# Altium PCB PCB1.PcbDoc
Units mm, origin at the board's own origin, x right, y up, seen from the top; angles counter-clockwise.
Board outline 102 x 102 mm, 2 copper layers (Top Layer, Bottom Layer); 131 components, 14 nets, 374 pads, 0 vias.
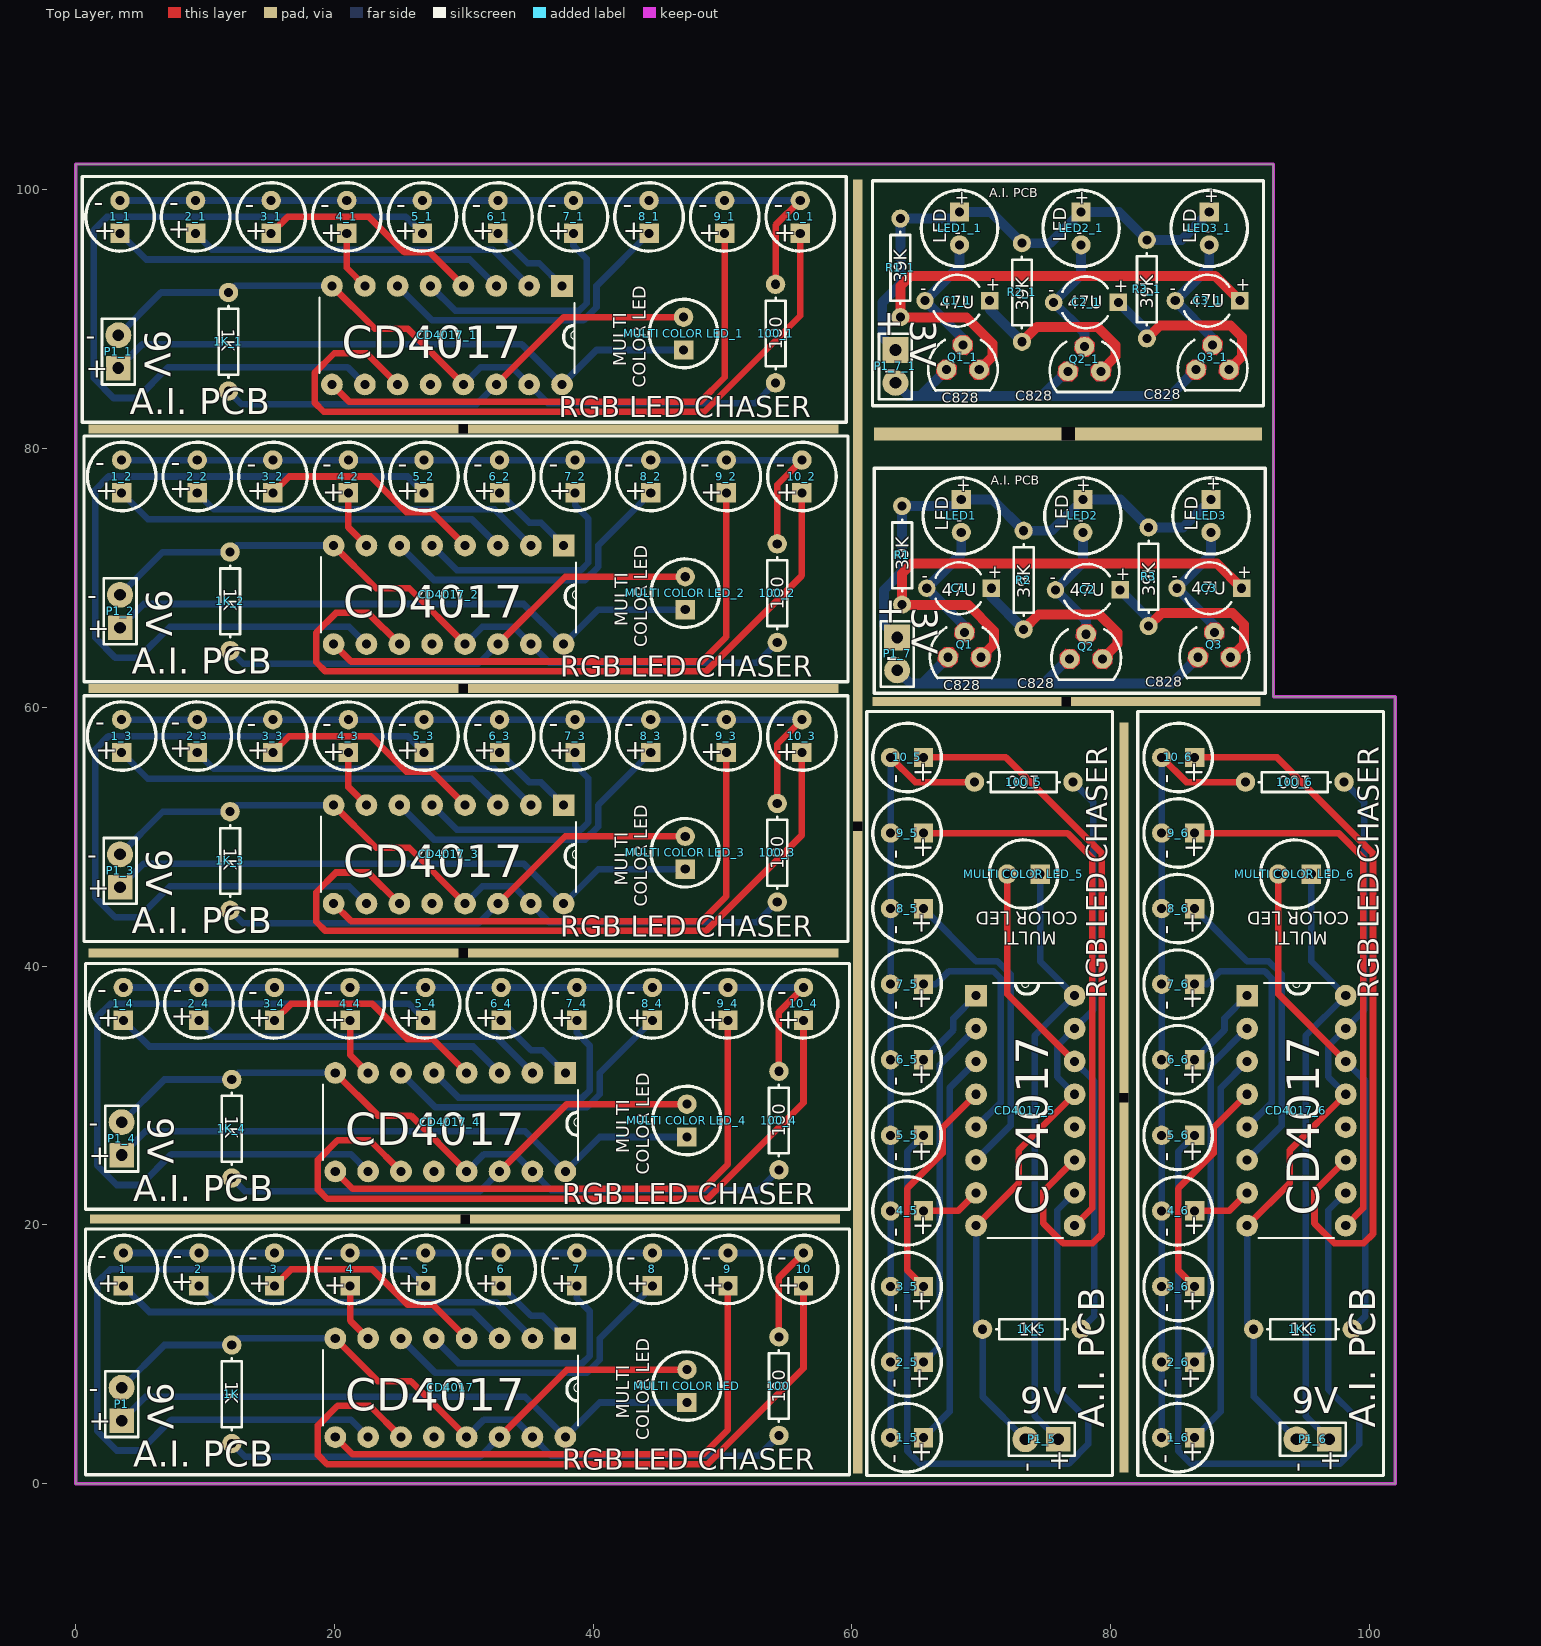
[diagram p0: Top Layer view]
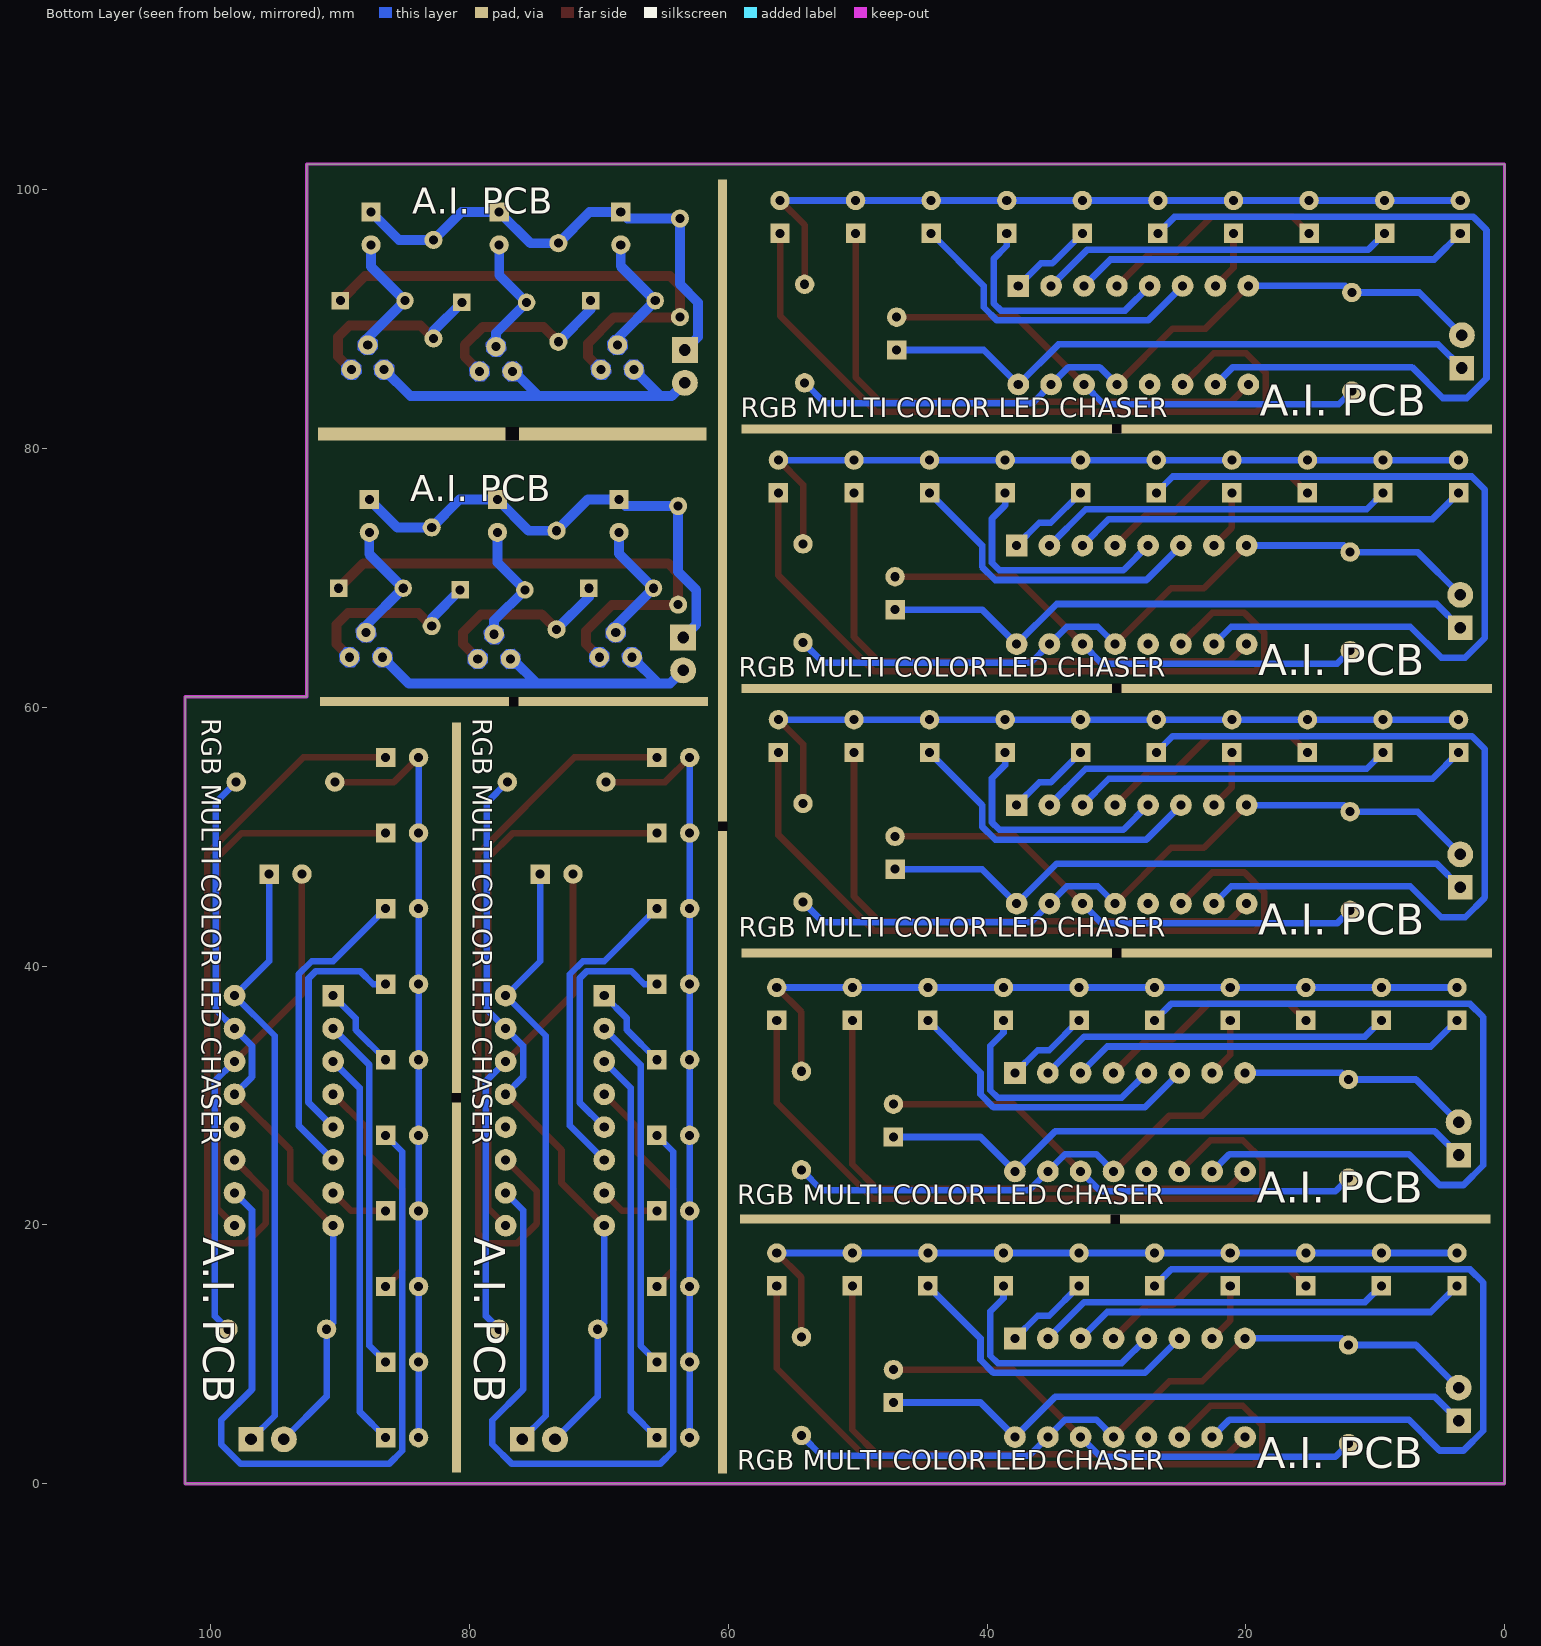
[diagram p1: Bottom Layer view, seen from below]

## Layer stack, top to bottom
Top Solder: solder mask 0.0102, Solder Resist, Dk 3.5
Top Layer: signal copper 0.0356
Dielectric 1: dielectric 0.32, FR-4, Dk 4.8
Bottom Layer: signal copper 0.0356
Bottom Solder: solder mask 0.0102, Solder Resist, Dk 3.5

## Board outline
0,0 102,0 102,60.833 92.583,60.833 92.583,102 0,102

## Design rules (kind name [scope] priority, off if disabled: settings)
Clearance [All] p1: gap=0.254 ignorepadtopadclearanceinfootprint=FALSE except(0: Arc-Hole Track-Hole SMDPad-Hole THPad-Hole Via-Hole Fill-Hole Poly-Hole Region-Hole Text-Hole)
PolygonConnect [All] p1: connectstyle=Relief reliefconductorwidth=0.254 reliefentries=4 polygonreliefangle="90 Angle" airgapwidth=0.254
RoutingVias [All] p1: holewidth=0.711 width=1.27 viastyle="Through Hole" minholewidth=0.711 minwidth=1.27 maxholewidth=0.711 maxwidth=1.27
SolderMaskExpansion [All] p1: expansion=0.102
Width [All] p1: maxlimit=0.762 minlimit=0.254 preferedwidth=0.508
30 further rules are at their usual default settings.

## Classes and differential pairs
component class Sheet1: 1 1K 2 3 4 5 6 7 8 9 10 100 CD4017 "MULTI COLOR LED" P1

## Components (designator, comment, footprint, x,y, rotation, side; value= is the part's Value field where it differs from the comment)
1 "L-53GD" L-53GD#1 3.683,16.56 r90 top
1_1 "L-53GD" L-53GD#1 3.429,97.917 r90 top (schematic designator 1)
1_2 "L-53GD" L-53GD#1 3.556,77.851 r90 top (schematic designator 1)
1_3 "L-53GD" L-53GD#1 3.556,57.785 r90 top (schematic designator 1)
1_4 "L-53GD" L-53GD#1 3.683,37.084 r90 top (schematic designator 1)
1_5 "L-53GD" L-53GD#1 64.262,3.556 r180 top (schematic designator 1)
1_6 "L-53GD" L-53GD#1 85.217,3.556 r180 top (schematic designator 1)
1K "Res1" AXIAL-0.3#1 12.065,6.908 r270 top value=1K
1K_1 "Res1" AXIAL-0.3#1 11.811,88.265 r270 top value=1K (schematic designator 1K)
1K_2 "Res1" AXIAL-0.3#1 11.938,68.199 r270 top value=1K (schematic designator 1K)
1K_3 "Res1" AXIAL-0.3#1 11.938,48.133 r270 top value=1K (schematic designator 1K)
1K_4 "Res1" AXIAL-0.3#1 12.065,27.432 r270 top value=1K (schematic designator 1K)
1K_5 "Res1" AXIAL-0.3#1 73.914,11.938 r0 top value=1K (schematic designator 1K)
1K_6 "Res1" AXIAL-0.3#1 94.869,11.938 r0 top value=1K (schematic designator 1K)
2 "L-53GD" L-53GD#1 9.525,16.56 r90 top
2_1 "L-53GD" L-53GD#1 9.271,97.917 r90 top (schematic designator 2)
2_2 "L-53GD" L-53GD#1 9.398,77.851 r90 top (schematic designator 2)
2_3 "L-53GD" L-53GD#1 9.398,57.785 r90 top (schematic designator 2)
2_4 "L-53GD" L-53GD#1 9.525,37.084 r90 top (schematic designator 2)
2_5 "L-53GD" L-53GD#1 64.262,9.398 r180 top (schematic designator 2)
2_6 "L-53GD" L-53GD#1 85.217,9.398 r180 top (schematic designator 2)
3 "L-53GD" L-53GD#1 15.367,16.56 r90 top
3_1 "L-53GD" L-53GD#1 15.113,97.917 r90 top (schematic designator 3)
3_2 "L-53GD" L-53GD#1 15.24,77.851 r90 top (schematic designator 3)
3_3 "L-53GD" L-53GD#1 15.24,57.785 r90 top (schematic designator 3)
3_4 "L-53GD" L-53GD#1 15.367,37.084 r90 top (schematic designator 3)
3_5 "L-53GD" L-53GD#1 64.262,15.24 r180 top (schematic designator 3)
3_6 "L-53GD" L-53GD#1 85.217,15.24 r180 top (schematic designator 3)
4 "L-53GD" L-53GD#1 21.209,16.56 r90 top
4_1 "L-53GD" L-53GD#1 20.955,97.917 r90 top (schematic designator 4)
4_2 "L-53GD" L-53GD#1 21.082,77.851 r90 top (schematic designator 4)
4_3 "L-53GD" L-53GD#1 21.082,57.785 r90 top (schematic designator 4)
4_4 "L-53GD" L-53GD#1 21.209,37.084 r90 top (schematic designator 4)
4_5 "L-53GD" L-53GD#1 64.262,21.082 r180 top (schematic designator 4)
4_6 "L-53GD" L-53GD#1 85.217,21.082 r180 top (schematic designator 4)
5 "L-53GD" L-53GD#1 27.051,16.56 r90 top
5_1 "L-53GD" L-53GD#1 26.797,97.917 r90 top (schematic designator 5)
5_2 "L-53GD" L-53GD#1 26.924,77.851 r90 top (schematic designator 5)
5_3 "L-53GD" L-53GD#1 26.924,57.785 r90 top (schematic designator 5)
5_4 "L-53GD" L-53GD#1 27.051,37.084 r90 top (schematic designator 5)
5_5 "L-53GD" L-53GD#1 64.262,26.924 r180 top (schematic designator 5)
5_6 "L-53GD" L-53GD#1 85.217,26.924 r180 top (schematic designator 5)
6 "L-53GD" L-53GD#1 32.893,16.56 r90 top
6_1 "L-53GD" L-53GD#1 32.639,97.917 r90 top (schematic designator 6)
6_2 "L-53GD" L-53GD#1 32.766,77.851 r90 top (schematic designator 6)
6_3 "L-53GD" L-53GD#1 32.766,57.785 r90 top (schematic designator 6)
6_4 "L-53GD" L-53GD#1 32.893,37.084 r90 top (schematic designator 6)
6_5 "L-53GD" L-53GD#1 64.262,32.766 r180 top (schematic designator 6)
6_6 "L-53GD" L-53GD#1 85.217,32.766 r180 top (schematic designator 6)
7 "L-53GD" L-53GD#1 38.735,16.56 r90 top
7_1 "L-53GD" L-53GD#1 38.481,97.917 r90 top (schematic designator 7)
7_2 "L-53GD" L-53GD#1 38.608,77.851 r90 top (schematic designator 7)
7_3 "L-53GD" L-53GD#1 38.608,57.785 r90 top (schematic designator 7)
7_4 "L-53GD" L-53GD#1 38.735,37.084 r90 top (schematic designator 7)
7_5 "L-53GD" L-53GD#1 64.262,38.608 r180 top (schematic designator 7)
7_6 "L-53GD" L-53GD#1 85.217,38.608 r180 top (schematic designator 7)
8 "L-53GD" L-53GD#1 44.577,16.56 r90 top
8_1 "L-53GD" L-53GD#1 44.323,97.917 r90 top (schematic designator 8)
8_2 "L-53GD" L-53GD#1 44.45,77.851 r90 top (schematic designator 8)
8_3 "L-53GD" L-53GD#1 44.45,57.785 r90 top (schematic designator 8)
8_4 "L-53GD" L-53GD#1 44.577,37.084 r90 top (schematic designator 8)
8_5 "L-53GD" L-53GD#1 64.262,44.45 r180 top (schematic designator 8)
8_6 "L-53GD" L-53GD#1 85.217,44.45 r180 top (schematic designator 8)
9 "L-53GD" L-53GD#1 50.419,16.56 r90 top
9_1 "L-53GD" L-53GD#1 50.165,97.917 r90 top (schematic designator 9)
9_2 "L-53GD" L-53GD#1 50.292,77.851 r90 top (schematic designator 9)
9_3 "L-53GD" L-53GD#1 50.292,57.785 r90 top (schematic designator 9)
9_4 "L-53GD" L-53GD#1 50.419,37.084 r90 top (schematic designator 9)
9_5 "L-53GD" L-53GD#1 64.262,50.292 r180 top (schematic designator 9)
9_6 "L-53GD" L-53GD#1 85.217,50.292 r180 top (schematic designator 9)
10 "L-53GD" L-53GD#1 56.261,16.56 r90 top
10_1 "L-53GD" L-53GD#1 56.007,97.917 r90 top (schematic designator 10)
10_2 "L-53GD" L-53GD#1 56.134,77.851 r90 top (schematic designator 10)
10_3 "L-53GD" L-53GD#1 56.134,57.785 r90 top (schematic designator 10)
10_4 "L-53GD" L-53GD#1 56.261,37.084 r90 top (schematic designator 10)
10_5 "L-53GD" L-53GD#1 64.262,56.134 r180 top (schematic designator 10)
10_6 "L-53GD" L-53GD#1 85.217,56.134 r180 top (schematic designator 10)
100 "Res1" AXIAL-0.3#1 54.356,7.543 r90 top value=1K
100_1 "Res1" AXIAL-0.3#1 54.102,88.9 r90 top value=1K (schematic designator 100)
100_2 "Res1" AXIAL-0.3#1 54.229,68.834 r90 top value=1K (schematic designator 100)
100_3 "Res1" AXIAL-0.3#1 54.229,48.768 r90 top value=1K (schematic designator 100)
100_4 "Res1" AXIAL-0.3#1 54.356,28.067 r90 top value=1K (schematic designator 100)
100_5 "Res1" AXIAL-0.3#1 73.279,54.229 r180 top value=1K (schematic designator 100)
100_6 "Res1" AXIAL-0.3#1 94.234,54.229 r180 top value=1K (schematic designator 100)
C1 "Cap2" CAPR5-4X5 68.286,69.215 r180 top value=100pF
C1_1 "Cap2" CAPR5-4X5 68.151,91.44 r180 top value=100pF (schematic designator C1)
C2 "Cap2" CAPR5-4X5 78.232,69.088 r180 top value=100pF
C2_1 "Cap2" CAPR5-4X5 78.097,91.313 r180 top value=100pF (schematic designator C2)
C3 "Cap2" CAPR5-4X5 87.63,69.215 r180 top value=100pF
C3_1 "Cap2" CAPR5-4X5 87.495,91.44 r180 top value=100pF (schematic designator C3)
CD4017 "CD4017BE" *DIP254P762X508-16 20.066,3.606 r270 top
CD4017_1 "CD4017BE" *DIP254P762X508-16 19.812,84.963 r270 top (schematic designator CD4017)
CD4017_2 "CD4017BE" *DIP254P762X508-16 19.939,64.897 r270 top (schematic designator CD4017)
CD4017_3 "CD4017BE" *DIP254P762X508-16 19.939,44.831 r270 top (schematic designator CD4017)
CD4017_4 "CD4017BE" *DIP254P762X508-16 20.066,24.13 r270 top (schematic designator CD4017)
CD4017_5 "CD4017BE" *DIP254P762X508-16 77.216,19.939 r0 top (schematic designator CD4017)
CD4017_6 "CD4017BE" *DIP254P762X508-16 98.171,19.939 r0 top (schematic designator CD4017)
LED1 "L-53GD" L-53GD#2 68.453,74.803 r270 top
LED1_1 "L-53GD" L-53GD#2 68.318,97.028 r270 top (schematic designator LED1)
LED2 "L-53GD" L-53GD#2 77.851,74.803 r270 top
LED2_1 "L-53GD" L-53GD#2 77.716,97.028 r270 top (schematic designator LED2)
LED3 "L-53GD" L-53GD#2 87.757,74.803 r270 top
LED3_1 "L-53GD" L-53GD#2 87.622,97.028 r270 top (schematic designator LED3)
"MULTI COLOR LED" "L-53GD" L-53GD#1 47.244,7.543 r90 top
"MULTI COLOR LED_1" "L-53GD" L-53GD#1 46.99,88.9 r90 top (schematic designator "MULTI COLOR LED")
"MULTI COLOR LED_2" "L-53GD" L-53GD#1 47.117,68.834 r90 top (schematic designator "MULTI COLOR LED")
"MULTI COLOR LED_3" "L-53GD" L-53GD#1 47.117,48.768 r90 top (schematic designator "MULTI COLOR LED")
"MULTI COLOR LED_4" "L-53GD" L-53GD#1 47.244,28.067 r90 top (schematic designator "MULTI COLOR LED")
"MULTI COLOR LED_5" "L-53GD" L-53GD#1 73.279,47.117 r180 top (schematic designator "MULTI COLOR LED")
"MULTI COLOR LED_6" "L-53GD" L-53GD#1 94.234,47.117 r180 top (schematic designator "MULTI COLOR LED")
P1 "Header 2" HDR1X2#1 3.556,4.876 r90 top
P1_1 "Header 2" HDR1X2#1 3.302,86.233 r90 top (schematic designator P1)
P1_2 "Header 2" HDR1X2#1 3.429,66.167 r90 top (schematic designator P1)
P1_3 "Header 2" HDR1X2#1 3.429,46.101 r90 top (schematic designator P1)
P1_4 "Header 2" HDR1X2#1 3.556,25.4 r90 top (schematic designator P1)
P1_5 "Header 2" HDR1X2#1 75.946,3.429 r180 top (schematic designator P1)
P1_6 "Header 2" HDR1X2#1 96.901,3.429 r180 top (schematic designator P1)
P1_7 "Header 2" HDR1X2#2 63.5,65.405 r270 top (schematic designator P1)
P1_7_1 "Header 2" HDR1X2#2 63.365,87.63 r270 top (schematic designator P1)
Q1 "P2N2222A" *TO92 68.707,63.881 r0 top
Q1_1 "P2N2222A" *TO92 68.572,86.106 r0 top (schematic designator Q1)
Q2 "P2N2222A" *TO92 78.105,63.754 r0 top
Q2_1 "P2N2222A" *TO92 77.97,85.979 r0 top (schematic designator Q2)
Q3 "P2N2222A" *TO92 88.011,63.881 r0 top
Q3_1 "P2N2222A" *TO92 87.876,86.106 r0 top (schematic designator Q3)
R1 "Res1" AXIAL-0.3#2 63.881,71.755 r90 top value=1K
R1_1 "Res1" AXIAL-0.3#2 63.746,93.98 r90 top value=1K (schematic designator R1)
R2 "Res1" AXIAL-0.3#2 73.279,69.85 r90 top value=1K
R2_1 "Res1" AXIAL-0.3#2 73.144,92.075 r90 top value=1K (schematic designator R2)
R3 "Res1" AXIAL-0.3#2 82.931,70.104 r90 top value=1K
R3_1 "Res1" AXIAL-0.3#2 82.796,92.329 r90 top value=1K (schematic designator R3)

## Footprints (in the part's own frame and the unit in brackets; to place one, negate y for a bottom-side part, rotate by r counter-clockwise, add the part's x,y. Pads: shape width x height; smd on the part's side, far side on the other; paste and mask are expansions set on the pad)
*DIP254P762X508-16 [mil]
  rect 66x66 hole 27.56: 1(-300,700)
  round 66 hole 27.56: 2(-300,600) 3(-300,500) 4(-300,400) 5(-300,300) 6(-300,200) 7(-300,100) 8(-300,0) 9(0,0) 10(0,100) 11(0,200) 12(0,300) 13(0,400) 14(0,500) 15(0,600) 16(0,700)
  silkscreen extent -265,-38 -35,738
*TO92 [mm]
  round 1.5 hole 0.7: 1(1.27,0) 2(0,1.905) 3(-1.27,0)
  Top Layer region: 2.058,0.287 1.624,0.76 0.983,0.788 0.51,0.354 0.482,-0.287 0.916,-0.76 1.557,-0.788 2.03,-0.354
  Top Layer region: 0.788,2.192 0.354,2.665 -0.287,2.693 -0.76,2.259 -0.788,1.618 -0.354,1.145 0.287,1.117 0.76,1.551
  Top Layer region: -0.482,0.287 -0.916,0.76 -1.557,0.788 -2.03,0.354 -2.058,-0.287 -1.624,-0.76 -0.983,-0.788 -0.51,-0.354
  Bottom Layer region: 2.058,0.287 1.624,0.76 0.983,0.788 0.51,0.354 0.482,-0.287 0.916,-0.76 1.557,-0.788 2.03,-0.354
  Bottom Layer region: 0.788,2.192 0.354,2.665 -0.287,2.693 -0.76,2.259 -0.788,1.618 -0.354,1.145 0.287,1.117 0.76,1.551
  Bottom Layer region: -0.482,0.287 -0.916,0.76 -1.557,0.788 -2.03,0.354 -2.058,-0.287 -1.624,-0.76 -0.983,-0.788 -0.51,-0.354
  Multi-Layer region: 2.058,0.287 1.624,0.76 0.983,0.788 0.51,0.354 0.482,-0.287 0.916,-0.76 1.557,-0.788 2.03,-0.354
  Multi-Layer region: 0.788,2.192 0.354,2.665 -0.287,2.693 -0.76,2.259 -0.788,1.618 -0.354,1.145 0.287,1.117 0.76,1.551
  Multi-Layer region: -0.482,0.287 -0.916,0.76 -1.557,0.788 -2.03,0.354 -2.058,-0.287 -1.624,-0.76 -0.983,-0.788 -0.51,-0.354
  silkscreen extent -2.68,-1.61 2.7,2.3
AXIAL-0.3#1 [mm] "Axial Device, Thru-Hole; 2 Leads; 0.3 in Pin Spacing"
  round 1.5 hole 0.7: 1(-3.81,0) 2(3.81,0)
  silkscreen extent -2.77,-0.76 2.77,0.76
AXIAL-0.3#2 [mm] "Axial Device, Thru-Hole; 2 Leads; 0.3 in Pin Spacing"
  round 1.4 hole 0.7: 1(-3.81,0) 2(3.81,0)
  silkscreen extent -2.77,-0.76 2.77,0.76
CAPR5-4X5 [mm] "Capacitor; 2 Leads"
  rect 1.35x1.35 hole 0.7: 1(-2.5,0)
  round 1.35 hole 0.7: 2(2.5,0)
  silkscreen extent -1.69,-2 1.82,2
HDR1X2#1 [mm] "Connector; Header; 2 Position"
  rect 1.9x1.9 hole 0.9: 1(0,0)
  round 2 hole 0.9: 2(2.54,0)
  silkscreen extent -1.27,-1.27 3.81,1.27
HDR1X2#2 [mm] "Connector; Header; 2 Position"
  rect 2x2 hole 0.9: 1(0,0)
  round 2 hole 0.9: 2(2.54,0)
  silkscreen extent -1.27,-1.27 3.81,1.27
L-53GD#1 [mm]
  rect 1.5x1.5 hole 0.7: 1(-1.27,0)
  round 1.5 hole 0.7: 2(1.27,0)
  silkscreen extent -2.65,-2.65 2.65,2.65
L-53GD#2 [mm]
  rect 1.48x1.48 hole 0.7: 1(-1.27,0)
  round 1.48 hole 0.7: 2(1.27,0)
  silkscreen extent -2.95,-2.95 2.95,2.95

## Part data
1 1_1 1_2 1_3 1_4 1_5 1_6 2 2_1 2_2 2_3 2_4 2_5 2_6 3 3_1 3_2 3_3 3_4 3_5 3_6 4 4_1 4_2 4_3 4_4 4_5 4_6 5 5_1 5_2 5_3 5_4 5_5 5_6 6 6_1 6_2 6_3 6_4 6_5 6_6 7 7_1 7_2 7_3 7_4 7_5 7_6 8 8_1 8_2 8_3 8_4 8_5 8_6 9 9_1 9_2 9_3 9_4 9_5 9_6 10 10_1 10_2 10_3 10_4 10_5 10_6 LED1 LED1_1 LED2 LED2_1 LED3 LED3_1 "MULTI COLOR LED" "MULTI COLOR LED_1" "MULTI COLOR LED_2" "MULTI COLOR LED_3" "MULTI COLOR LED_4" "MULTI COLOR LED_5" "MULTI COLOR LED_6": "LED", Manufacturer_Name=Kingbright, Mouser Part Number=N/A, RS Part Number=2286004A, Allied_Number=70424261, Allied Price/Stock=http://www.alliedelec.com/kingbright-l-53gd/70424261/, Datasheet Link=http://docs-emea.rs-online.com/webdocs/151e/0900766b8151e408.pdf, Manufacturer_Part_Number=L-53GD, Mouser Price/Stock=https://www.mouser.com/Search/Refine.aspx?Keyword=N%2FA, RS Price/Stock=http://uk.rs-online.com/web/p/products/2286004A
1K 1K_1 1K_2 1K_3 1K_4 1K_5 1K_6 100 100_1 100_2 100_3 100_4 100_5 100_6 R1 R1_1 R2 R2_1 R3 R3_1: "Resistor", LatestRevisionDate=17-Jul-2002, LatestRevisionNote="Re-released for DXP Platform.", PackageDescription="Axial Device, Thru-Hole; 2 Leads; 0.3 in Pin Spacing", PackageReference=AXIAL-0.3, Published=8-Jun-2000, Publisher="Altium Limited"
C1 C1_1 C2 C2_1 C3 C3_1: "Capacitor", PackageDescription="Capacitor; 2 Leads", PackageReference=CAPR5-4X5, Published=23-Sep-2002, Publisher="Altium Limited"
CD4017 CD4017_1 CD4017_2 CD4017_3 CD4017_4 CD4017_5 CD4017_6: "IC Mos 4017/CD4017BE HARRIS", Package="DIP-16 Intersil", Availability=Unavailable, MF=Texas, MP=CD4017BE, Price=None, SnapEDA_Link=https://www.snapeda.com/parts/CD4017BE/Texas%20Instruments/view-part/?ref=snap
P1 P1_1 P1_2 P1_3 P1_4 P1_5 P1_6 P1_7 P1_7_1: "Header, 2-Pin", LatestRevisionDate=17-Jul-2002, LatestRevisionNote="Re-released for DXP Platform.", Publisher="Altium Limited"
Q1 Q1_1 Q2 Q2_1 Q3 Q3_1: Package="TO-92 NXP Semiconductors", Availability=Unavailable, MF="ON Semiconductor", MP=P2N2222A, Price=None, SnapEDA_Link=https://www.snapeda.com/parts/P2N2222A/ON%20Semiconductor/view-part/?ref=snap

## Free pads (board coordinates)
  rect 58x0.7 hole 0.7 square: 2(29.972,41.021) 2(29.972,61.468) 2(29.972,81.534) 2(30.099,20.447)
  rect 30x0.7 hole 0.7 square: 2(76.581,60.452)
  rect 0.7x58 hole 0.7 square: 2(81.026,29.845)
  rect 0.7x100 hole 0.7 square: 3(60.452,50.8)
  rect 30x1 hole 1 square: 4(76.708,81.153)

## Nets (pads, with @x,y where several pads share a name; then routed paths per layer and width w, separated by ;. In a path a pad name is that pad's centre, name@x,y a point inside that pad or via, vN(x,y) a via of type N, cw(c..) or ccw(c..) an arc to the next point about the centre after c; other vN are vias at no path point)
Net1_1: 1.1 CD4017.3 | length 30.8
  Bottom Layer w0.508: 1.1 5.703,13.27 30.722,13.27 CD4017.3
Net1_2: 1.2 2.2 3.2 4.2 5.2 6.2 7.2 8.2 9.2 10.2 100.2 | length 59.8
  Top Layer w0.508: 100.2 54.356,15.925 10.2
  Bottom Layer w0.508: 1.2 2.2 3.2 4.2 5.2 6.2 7.2 8.2 9.2 10.2
Net1K_1: 1K.1 100.1 CD4017.8 CD4017.13 CD4017.15 P1.2 | length 57.9
  Top Layer w0.508: CD4017.8 23.368,7.924 25.908,7.924 CD4017.13
  Bottom Layer w0.508: P1.2 6.858,10.718 1K.1 12.573,11.226 CD4017.8 ; CD4017.13 31.572,4.952 33.96,4.952 CD4017.15 36.754,2.158 52.781,2.158 100.1
Net1K_2: 1K.2 "MULTI COLOR LED.2" CD4017.14 | length 38.4
  Top Layer w0.508: CD4017.14 37.973,8.813 47.244,8.813
  Bottom Layer w0.508: 1K.2 13.081,2.082 31.242,2.082 CD4017.14
Net2_1: 2.1 CD4017.2 | length 27.5
  Bottom Layer w0.508: 2.1 10.783,14.032 32.5,14.032 CD4017.2
Net3_1: 3.1 CD4017.4 | length 17.6
  Top Layer w0.508: 3.1 16.637,16.56 22.936,16.56 25.679,13.817 27.635,13.817 CD4017.4
Net4_1: 4.1 CD4017.7 | length 4.6
  Top Layer w0.508: 4.1 21.209,12.623 CD4017.7
Net5_1: 5.1 CD4017.10 | length 60.9
  Bottom Layer w0.508: CD4017.10 21.26,4.952 7.417,4.952 5.029,2.565 3.175,2.565 1.651,4.089 1.651,15.544 2.667,16.56 25.781,16.56 5.1
Net6_1: 6.1 CD4017.1 | length 6.6
  Bottom Layer w0.508: 6.1 35.204,12.979 36.093,12.979 CD4017.1
Net7_1: 7.1 CD4017.5 | length 18.9
  Bottom Layer w0.508: CD4017.5 29.591,9.321 39.181,9.321 39.751,9.891 39.751,13.309 38.735,14.325 7.1
Net8_1: 8.1 CD4017.6 | length 24.3
  Bottom Layer w0.508: CD4017.6 27.813,8.559 39.497,8.559 40.513,9.575 40.513,11.226 8.1
Net9_1: 9.1 CD4017.9 | length 42.8
  Top Layer w0.508: CD4017.9 21.412,2.26 48.514,2.26 50.419,4.165 9.1
Net10_1: 10.1 CD4017.11 | length 57.6
  Top Layer w0.508: CD4017.11 22.733,6.019 20.244,6.019 18.72,4.495 18.72,2.209 19.431,1.498 48.844,1.498 56.261,8.915 10.1
NetCD4017_16: "MULTI COLOR LED.1" CD4017.16 P1.1 | length 46.8
  Bottom Layer w0.508: P1.1 5.385,6.705 34.747,6.705 CD4017.16 40.513,6.273 47.244,6.273
pads on no net: 1_1.1 1_1.2 1_2.1 1_2.2 1_3.1 1_3.2 1_4.1 1_4.2 1_5.1 1_5.2 1_6.1 1_6.2 1K_1.1 1K_1.2 1K_2.1 1K_2.2 1K_3.1 1K_3.2 1K_4.1 1K_4.2 1K_5.1 1K_5.2 1K_6.1 1K_6.2 2_1.1 2_1.2 2_2.1 2_2.2 2_3.1 2_3.2 2_4.1 2_4.2 2_5.1 2_5.2 2_6.1 2_6.2 3_1.1 3_1.2 3_2.1 3_2.2 3_3.1 3_3.2 3_4.1 3_4.2 3_5.1 3_5.2 3_6.1 3_6.2 4_1.1 4_1.2 4_2.1 4_2.2 4_3.1 4_3.2 4_4.1 4_4.2 4_5.1 4_5.2 4_6.1 4_6.2 5_1.1 5_1.2 5_2.1 5_2.2 5_3.1 5_3.2 5_4.1 5_4.2 5_5.1 5_5.2 5_6.1 5_6.2 6_1.1 6_1.2 6_2.1 6_2.2 6_3.1 6_3.2 6_4.1 6_4.2 6_5.1 6_5.2 6_6.1 6_6.2 7_1.1 7_1.2 7_2.1 7_2.2 7_3.1 7_3.2 7_4.1 7_4.2 7_5.1 7_5.2 7_6.1 7_6.2 8_1.1 8_1.2 8_2.1 8_2.2 8_3.1 8_3.2 8_4.1 8_4.2 8_5.1 8_5.2 8_6.1 8_6.2 9_1.1 9_1.2 9_2.1 9_2.2 9_3.1 9_3.2 9_4.1 9_4.2 9_5.1 9_5.2 9_6.1 9_6.2 10_1.1 10_1.2 10_2.1 10_2.2 10_3.1 10_3.2 10_4.1 10_4.2 10_5.1 10_5.2 10_6.1 10_6.2 100_1.1 100_1.2 100_2.1 100_2.2 100_3.1 100_3.2 100_4.1 100_4.2 100_5.1 100_5.2 100_6.1 100_6.2 "MULTI COLOR LED_1.1" "MULTI COLOR LED_1.2" "MULTI COLOR LED_2.1" "MULTI COLOR LED_2.2" "MULTI COLOR LED_3.1" "MULTI COLOR LED_3.2" "MULTI COLOR LED_4.1" "MULTI COLOR LED_4.2" "MULTI COLOR LED_5.1" "MULTI COLOR LED_5.2" "MULTI COLOR LED_6.1" "MULTI COLOR LED_6.2" C1.1 C1.2 C1_1.1 C1_1.2 C2.1 C2.2 C2_1.1 C2_1.2 C3.1 C3.2 C3_1.1 C3_1.2 CD4017.12 CD4017_1.1 CD4017_1.2 CD4017_1.3 CD4017_1.4 CD4017_1.5 CD4017_1.6 CD4017_1.7 CD4017_1.8 CD4017_1.9 CD4017_1.10 CD4017_1.11 CD4017_1.12 CD4017_1.13 CD4017_1.14 CD4017_1.15 CD4017_1.16 CD4017_2.1 CD4017_2.2 CD4017_2.3 CD4017_2.4 CD4017_2.5 CD4017_2.6 CD4017_2.7 CD4017_2.8 CD4017_2.9 CD4017_2.10 CD4017_2.11 CD4017_2.12 CD4017_2.13 CD4017_2.14 CD4017_2.15 CD4017_2.16 CD4017_3.1 CD4017_3.2 CD4017_3.3 CD4017_3.4 CD4017_3.5 CD4017_3.6 CD4017_3.7 CD4017_3.8 CD4017_3.9 CD4017_3.10 CD4017_3.11 CD4017_3.12 CD4017_3.13 CD4017_3.14 CD4017_3.15 CD4017_3.16 CD4017_4.1 CD4017_4.2 CD4017_4.3 CD4017_4.4 CD4017_4.5 CD4017_4.6 CD4017_4.7 CD4017_4.8 CD4017_4.9 CD4017_4.10 CD4017_4.11 CD4017_4.12 CD4017_4.13 CD4017_4.14 CD4017_4.15 CD4017_4.16 CD4017_5.1 CD4017_5.2 CD4017_5.3 CD4017_5.4 CD4017_5.5 CD4017_5.6 CD4017_5.7 CD4017_5.8 CD4017_5.9 CD4017_5.10 CD4017_5.11 CD4017_5.12 CD4017_5.13 CD4017_5.14 CD4017_5.15 CD4017_5.16 CD4017_6.1 CD4017_6.2 CD4017_6.3 CD4017_6.4 CD4017_6.5 CD4017_6.6 CD4017_6.7 CD4017_6.8 CD4017_6.9 CD4017_6.10 CD4017_6.11 CD4017_6.12 CD4017_6.13 CD4017_6.14 CD4017_6.15 CD4017_6.16 LED1.1 LED1.2 LED1_1.1 LED1_1.2 LED2.1 LED2.2 LED2_1.1 LED2_1.2 LED3.1 LED3.2 LED3_1.1 LED3_1.2 P1_1.1 P1_1.2 P1_2.1 P1_2.2 P1_3.1 P1_3.2 P1_4.1 P1_4.2 P1_5.1 P1_5.2 P1_6.1 P1_6.2 P1_7.1 P1_7.2 P1_7_1.1 P1_7_1.2 Q1.1 Q1.2 Q1.3 Q1_1.1 Q1_1.2 Q1_1.3 Q2.1 Q2.2 Q2.3 Q2_1.1 Q2_1.2 Q2_1.3 Q3.1 Q3.2 Q3.3 Q3_1.1 Q3_1.2 Q3_1.3 R1.1 R1.2 R1_1.1 R1_1.2 R2.1 R2.2 R2_1.1 R2_1.2 R3.1 R3.2 R3_1.1 R3_1.2
copper on no net: | length 3306.1
  Top Layer w0.508: 15.113,96.647 16.383,97.917 22.682,97.917 25.425,95.174 27.381,95.174 29.972,92.583 ; 15.24,56.515 16.51,57.785 22.809,57.785 25.552,55.042 27.508,55.042 30.099,52.451 ; 15.24,76.581 16.51,77.851 22.809,77.851 25.552,75.108 27.508,75.108 30.099,72.517 ; 15.367,35.814 16.637,37.084 22.936,37.084 25.679,34.341 27.635,34.341 30.226,31.75 ; 19.812,84.963 21.158,83.617 48.26,83.617 50.165,85.522 50.165,96.647 ; 19.812,92.583 23.114,89.281 25.654,89.281 29.972,84.963 ; 19.939,44.831 21.285,43.485 48.387,43.485 50.292,45.39 50.292,56.515 ; 19.939,52.451 23.241,49.149 25.781,49.149 30.099,44.831 ; 19.939,64.897 21.285,63.551 48.387,63.551 50.292,65.456 50.292,76.581 ; 19.939,72.517 23.241,69.215 25.781,69.215 30.099,64.897 ; 20.066,24.13 21.412,22.784 48.514,22.784 50.419,24.689 50.419,35.814 ; 20.066,31.75 23.368,28.448 25.908,28.448 30.226,24.13 ; 20.955,96.647 20.955,93.98 22.352,92.583 ; 21.082,56.515 21.082,53.848 22.479,52.451 ; 21.082,76.581 21.082,73.914 22.479,72.517 ; 21.209,35.814 21.209,33.147 22.606,31.75 ; 24.892,84.963 22.479,87.376 19.99,87.376 18.466,85.852 18.466,83.566 19.177,82.855 48.59,82.855 56.007,90.272 56.007,96.647 ; 25.019,44.831 22.606,47.244 20.117,47.244 18.593,45.72 18.593,43.434 19.304,42.723 48.717,42.723 56.134,50.14 56.134,56.515 ; 25.019,64.897 22.606,67.31 20.117,67.31 18.593,65.786 18.593,63.5 19.304,62.789 48.717,62.789 56.134,70.206 56.134,76.581 ; 25.146,24.13 22.733,26.543 20.244,26.543 18.72,25.019 18.72,22.733 19.431,22.022 48.844,22.022 56.261,29.439 56.261,35.814 ; 32.512,84.963 37.719,90.17 46.99,90.17 ; 32.639,44.831 37.846,50.038 47.117,50.038 ; 32.639,64.897 37.846,70.104 47.117,70.104 ; 32.766,24.13 37.973,29.337 47.244,29.337 ; 54.102,92.71 54.102,97.282 56.007,99.187 ; 54.229,52.578 54.229,57.15 56.134,59.055 ; 54.229,72.644 54.229,77.216 56.134,79.121 ; 54.356,31.877 54.356,36.449 56.261,38.354 ; 62.992,56.134 64.897,54.229 69.469,54.229 ; 65.532,15.24 64.262,16.51 64.262,22.809 67.005,25.552 67.005,27.508 69.596,30.099 ; 65.532,21.082 68.199,21.082 69.596,22.479 ; 65.532,50.292 76.657,50.292 78.562,48.387 78.562,21.285 77.216,19.939 ; 65.532,56.134 71.907,56.134 79.324,48.717 79.324,19.304 78.613,18.593 76.327,18.593 74.803,20.117 74.803,22.606 77.216,25.019 ; 69.596,19.939 72.898,23.241 72.898,25.781 77.216,30.099 ; 72.009,47.117 72.009,37.846 77.216,32.639 ; 83.947,56.134 85.852,54.229 90.424,54.229 ; 86.487,15.24 85.217,16.51 85.217,22.809 87.96,25.552 87.96,27.508 90.551,30.099 ; 86.487,21.082 89.154,21.082 90.551,22.479 ; 86.487,50.292 97.612,50.292 99.517,48.387 99.517,21.285 98.171,19.939 ; 86.487,56.134 92.862,56.134 100.279,48.717 100.279,19.304 99.568,18.593 97.282,18.593 95.758,20.117 95.758,22.606 98.171,25.019 ; 90.551,19.939 93.853,23.241 93.853,25.781 98.171,30.099 ; 92.964,47.117 92.964,37.846 98.171,32.639
  Top Layer w0.762: 69.842,86.106 70.858,87.122 70.858,88.138 68.866,90.13 63.746,90.13 63.746,90.17 63.746,92.583 64.508,93.345 88.09,93.345 89.995,91.44 ; 69.977,63.881 70.993,64.897 70.993,65.913 69.001,67.905 63.881,67.905 63.881,67.945 63.881,70.358 64.643,71.12 88.225,71.12 90.13,69.215 ; 73.144,88.265 74.287,89.408 78.986,89.408 80.383,88.011 80.383,87.122 79.24,85.979 ; 73.279,66.04 74.422,67.183 79.121,67.183 80.518,65.786 80.518,64.897 79.375,63.754 ; 82.796,88.519 83.812,89.535 89.273,89.535 90.162,88.646 90.162,87.122 89.146,86.106 ; 82.931,66.294 83.947,67.31 89.408,67.31 90.297,66.421 90.297,64.897 89.281,63.881
  Bottom Layer w0.508: 3.302,86.233 5.131,88.062 34.493,88.062 37.592,84.963 40.259,87.63 46.99,87.63 ; 3.302,88.773 6.604,92.075 11.811,92.075 12.319,92.583 19.812,92.583 ; 3.429,46.101 5.258,47.93 34.62,47.93 37.719,44.831 40.386,47.498 47.117,47.498 ; 3.429,48.641 6.731,51.943 11.938,51.943 12.446,52.451 19.939,52.451 ; 3.429,66.167 5.258,67.996 34.62,67.996 37.719,64.897 40.386,67.564 47.117,67.564 ; 3.429,68.707 6.731,72.009 11.938,72.009 12.446,72.517 19.939,72.517 ; 3.429,96.647 5.449,94.627 30.468,94.627 32.512,92.583 ; 3.429,99.187 9.271,99.187 15.113,99.187 20.955,99.187 26.797,99.187 32.639,99.187 38.481,99.187 44.323,99.187 50.165,99.187 56.007,99.187 ; 3.556,25.4 5.385,27.229 34.747,27.229 37.846,24.13 40.513,26.797 47.244,26.797 ; 3.556,27.94 6.858,31.242 12.065,31.242 12.573,31.75 20.066,31.75 ; 3.556,56.515 5.576,54.495 30.595,54.495 32.639,52.451 ; 3.556,59.055 9.398,59.055 15.24,59.055 21.082,59.055 26.924,59.055 32.766,59.055 38.608,59.055 44.45,59.055 50.292,59.055 56.134,59.055 ; 3.556,76.581 5.576,74.561 30.595,74.561 32.639,72.517 ; 3.556,79.121 9.398,79.121 15.24,79.121 21.082,79.121 26.924,79.121 32.766,79.121 38.608,79.121 44.45,79.121 50.292,79.121 56.134,79.121 ; 3.683,35.814 5.703,33.794 30.722,33.794 32.766,31.75 ; 3.683,38.354 9.525,38.354 15.367,38.354 21.209,38.354 27.051,38.354 32.893,38.354 38.735,38.354 44.577,38.354 50.419,38.354 56.261,38.354 ; 9.271,96.647 10.529,95.389 32.246,95.389 35.052,92.583 ; 9.398,56.515 10.656,55.257 32.373,55.257 35.179,52.451 ; 9.398,76.581 10.656,75.323 32.373,75.323 35.179,72.517 ; 9.525,35.814 10.783,34.556 32.5,34.556 35.306,31.75 ; 11.811,84.455 12.827,83.439 30.988,83.439 32.512,84.963 ; 11.938,44.323 12.954,43.307 31.115,43.307 32.639,44.831 ; 11.938,64.389 12.954,63.373 31.115,63.373 32.639,64.897 ; 12.065,23.622 13.081,22.606 31.242,22.606 32.766,24.13 ; 22.352,84.963 21.006,86.309 7.163,86.309 4.775,83.922 2.921,83.922 1.397,85.446 1.397,96.901 2.413,97.917 25.527,97.917 26.797,96.647 ; 22.479,44.831 21.133,46.177 7.29,46.177 4.902,43.79 3.048,43.79 1.524,45.314 1.524,56.769 2.54,57.785 25.654,57.785 26.924,56.515 ; 22.479,64.897 21.133,66.243 7.29,66.243 4.902,63.856 3.048,63.856 1.524,65.38 1.524,76.835 2.54,77.851 25.654,77.851 26.924,76.581 ; 22.606,24.13 21.26,25.476 7.417,25.476 5.029,23.089 3.175,23.089 1.651,24.613 1.651,36.068 2.667,37.084 25.781,37.084 27.051,35.814 ; 24.892,92.583 27.559,89.916 39.243,89.916 40.259,90.932 40.259,92.583 44.323,96.647 ; 25.019,52.451 27.686,49.784 39.37,49.784 40.386,50.8 40.386,52.451 44.45,56.515 ; 25.019,72.517 27.686,69.85 39.37,69.85 40.386,70.866 40.386,72.517 44.45,76.581 ; 25.146,31.75 27.813,29.083 39.497,29.083 40.513,30.099 40.513,31.75 44.577,35.814 ; 27.432,92.583 29.337,90.678 38.927,90.678 39.497,91.248 39.497,94.666 38.481,95.682 38.481,96.647 ; 27.559,52.451 29.464,50.546 39.054,50.546 39.624,51.116 39.624,54.534 38.608,55.55 38.608,56.515 ; 27.559,72.517 29.464,70.612 39.054,70.612 39.624,71.182 39.624,74.6 38.608,75.616 38.608,76.581 ; 27.686,31.75 29.591,29.845 39.181,29.845 39.751,30.415 39.751,33.833 38.735,34.849 38.735,35.814 ; 29.972,84.963 31.318,86.309 33.706,86.309 35.052,84.963 36.5,83.515 52.527,83.515 54.102,85.09 ; 30.099,44.831 31.445,46.177 33.833,46.177 35.179,44.831 36.627,43.383 52.654,43.383 54.229,44.958 ; 30.099,64.897 31.445,66.243 33.833,66.243 35.179,64.897 36.627,63.449 52.654,63.449 54.229,65.024 ; 30.226,24.13 31.572,25.476 33.96,25.476 35.306,24.13 36.754,22.682 52.781,22.682 54.356,24.257 ; 32.639,96.647 34.95,94.336 35.839,94.336 37.592,92.583 ; 32.766,56.515 35.077,54.204 35.966,54.204 37.719,52.451 ; 32.766,76.581 35.077,74.27 35.966,74.27 37.719,72.517 ; 32.893,35.814 35.204,33.503 36.093,33.503 37.846,31.75 ; 62.992,3.556 62.992,9.398 62.992,15.24 62.992,21.082 62.992,26.924 62.992,32.766 62.992,38.608 62.992,44.45 62.992,50.292 62.992,56.134 ; 65.532,3.556 67.552,5.576 67.552,30.595 69.596,32.639 ; 65.532,9.398 66.79,10.656 66.79,32.373 69.596,35.179 ; 65.532,26.924 64.262,25.654 64.262,2.54 65.278,1.524 76.733,1.524 78.257,3.048 78.257,4.902 75.87,7.29 75.87,21.133 77.216,22.479 ; 65.532,32.766 67.843,35.077 67.843,35.966 69.596,37.719 ; 65.532,38.608 66.497,38.608 67.513,39.624 70.931,39.624 71.501,39.054 71.501,29.464 69.596,27.559 ; 65.532,44.45 69.596,40.386 71.247,40.386 72.263,39.37 72.263,27.686 69.596,25.019 ; 69.596,19.939 69.596,12.446 70.104,11.938 70.104,6.731 73.406,3.429 ; 74.549,47.117 74.549,40.386 77.216,37.719 74.117,34.62 74.117,5.258 75.946,3.429 ; 77.089,54.229 78.664,52.654 78.664,36.627 77.216,35.179 75.87,33.833 75.87,31.445 77.216,30.099 ; 77.216,32.639 78.74,31.115 78.74,12.954 77.724,11.938 ; 83.947,3.556 83.947,9.398 83.947,15.24 83.947,21.082 83.947,26.924 83.947,32.766 83.947,38.608 83.947,44.45 83.947,50.292 83.947,56.134 ; 86.487,3.556 88.507,5.576 88.507,30.595 90.551,32.639 ; 86.487,9.398 87.745,10.656 87.745,32.373 90.551,35.179 ; 86.487,26.924 85.217,25.654 85.217,2.54 86.233,1.524 97.688,1.524 99.212,3.048 99.212,4.902 96.825,7.29 96.825,21.133 98.171,22.479 ; 86.487,32.766 88.798,35.077 88.798,35.966 90.551,37.719 ; 86.487,38.608 87.452,38.608 88.468,39.624 91.886,39.624 92.456,39.054 92.456,29.464 90.551,27.559 ; 86.487,44.45 90.551,40.386 92.202,40.386 93.218,39.37 93.218,27.686 90.551,25.019 ; 90.551,19.939 90.551,12.446 91.059,11.938 91.059,6.731 94.361,3.429 ; 95.504,47.117 95.504,40.386 98.171,37.719 95.072,34.62 95.072,5.258 96.901,3.429 ; 98.044,54.229 99.619,52.654 99.619,36.627 98.171,35.179 96.825,33.833 96.825,31.445 98.171,30.099 ; 98.171,32.639 99.695,31.115 99.695,12.954 98.679,11.938
  Bottom Layer w0.762: 63.365,85.09 64.381,84.074 65.27,84.074 ; 63.365,87.63 62.349,88.646 62.349,91.313 63.746,92.71 63.746,97.79 67.81,97.79 68.318,98.298 70.731,98.298 73.144,95.885 75.303,95.885 77.716,98.298 80.637,98.298 82.796,96.139 85.463,96.139 87.622,98.298 ; 63.5,62.865 64.516,61.849 65.405,61.849 ; 63.5,65.405 62.484,66.421 62.484,69.088 63.881,70.485 63.881,75.565 67.945,75.565 68.453,76.073 70.866,76.073 73.279,73.66 75.438,73.66 77.851,76.073 80.772,76.073 82.931,73.914 85.598,73.914 87.757,76.073 ; 67.302,86.106 65.27,84.074 ; 67.437,63.881 65.405,61.849 ; 68.318,95.758 68.318,94.107 65.651,91.44 68.572,88.519 68.572,88.011 ; 68.453,73.533 68.453,71.882 65.786,69.215 68.707,66.294 68.707,65.786 ; 70.651,91.44 70.651,90.758 73.144,88.265 ; 70.786,69.215 70.786,68.533 73.279,66.04 ; 76.7,85.979 76.573,85.979 74.668,84.074 ; 76.835,63.754 76.708,63.754 74.803,61.849 ; 77.716,95.758 77.716,93.432 75.597,91.313 77.97,88.94 77.97,87.884 ; 77.851,73.533 77.851,71.207 75.732,69.088 78.105,66.715 78.105,65.659 ; 80.597,91.313 82.796,89.114 82.796,88.519 ; 80.732,69.088 82.931,66.889 82.931,66.294 ; 86.606,86.106 84.574,84.074 74.668,84.074 ; 86.741,63.881 84.709,61.849 74.803,61.849 ; 87.622,95.758 87.622,94.067 84.995,91.44 87.876,88.559 87.876,88.011 ; 87.757,73.533 87.757,71.842 85.13,69.215 88.011,66.334 88.011,65.786 ; 65.27,84.074 74.668,84.074 ; 65.405,61.849 74.803,61.849

## Keep-outs
Keep-Out Layer:
  lines w0.254: 101.981,60.833 92.583,60.833 92.583,102 0,102 0,0 102,0 102,60.833

## Silkscreen, mask and mechanical layers (free items; w line width, h text height)
Top Overlay:
  lines w0.254: 38.481,87.757 cw(c38.544,88.582) 37.719,88.646 cw(c38.544,88.709) 38.481,89.535 ; 38.608,47.625 cw(c38.672,48.45) 37.846,48.514 cw(c38.672,48.578) 38.608,49.403 ; 38.608,67.691 cw(c38.672,68.516) 37.846,68.58 cw(c38.672,68.644) 38.608,69.469 ; 38.735,6.4 cw(c38.798,7.225) 37.973,7.289 cw(c38.798,7.352) 38.735,8.178 ; 38.735,26.924 cw(c38.798,27.749) 37.973,27.813 cw(c38.798,27.877) 38.735,28.702 ; 72.644,38.608 ccw(c73.469,38.672) 73.533,37.846 ccw(c73.596,38.672) 74.422,38.608 ; 93.599,38.608 ccw(c94.424,38.672) 94.488,37.846 ccw(c94.551,38.672) 95.377,38.608 ; 0.508,82.042 0.508,101.042 59.563,101.042 59.563,82.042 0.508,82.042 ; 0.635,41.91 0.635,60.91 59.69,60.91 59.69,41.91 0.635,41.91 ; 0.635,61.976 0.635,80.976 59.69,80.976 59.69,61.976 0.635,61.976 ; 0.762,0.685 59.817,0.685 59.817,19.685 0.762,19.685 0.762,0.685 ; 0.762,21.209 0.762,40.209 59.817,40.209 59.817,21.209 0.762,21.209 ; 61.137,0.635 80.137,0.635 80.137,59.69 61.137,59.69 61.137,0.635 ; 61.587,83.312 91.813,83.312 91.813,100.711 61.587,100.711 61.587,83.312 ; 61.722,61.087 61.722,78.486 91.948,78.486 91.948,61.087 61.722,61.087 ; 82.092,0.635 101.092,0.635 101.092,59.69 82.092,59.69 82.092,0.635
  text "A.I. PCB" at 70.604,99.441 h0.7
  text "+" at 87.241,99.06 h1
  text "+" at 67.937,98.933 h1
  text "+" at 77.208,98.933 h1
  text "-" at 1.397,98.298 h1.52
  text "-" at 7.239,98.298 h1.52
  text "-" at 13.081,98.171 h1.52
  text "-" at 18.923,98.171 h1.52
  text "-" at 24.765,98.171 h1.52
  text "-" at 30.607,98.171 h1.52
  text "-" at 36.449,98.171 h1.52
  text "-" at 42.291,98.171 h1.52
  text "-" at 48.133,98.171 h1.52
  text "-" at 53.975,98.171 h1.52
  text "-" at 87.241,96.393 h1
  text "+" at 7.112,96.266 h1.52
  text "-" at 67.937,96.266 h1
  text "-" at 77.335,96.266 h1
  text "+" at 1.397,96.139 h1.52
  text "+" at 13.081,96.139 h1.52
  text "+" at 24.638,96.139 h1.52
  text "+" at 30.607,96.139 h1.52
  text "+" at 36.449,96.139 h1.52
  text "+" at 42.291,96.139 h1.52
  text "+" at 18.923,96.012 h1.52
  text "+" at 48.133,96.012 h1.52
  text "+" at 53.975,96.012 h1.52
  text "LED" at 76.573,96.012 h1 r90
  text "LED" at 67.302,95.885 h1 r90
  text "LED" at 86.606,95.885 h1 r90
  text "39K" at 64.254,92.837 h1 r90
  text "+" at 70.35,92.202 h1
  text "+" at 89.654,92.202 h1
  text "+" at 80.256,92.075 h1
  text "-" at 65.27,91.948 h1
  text "-" at 84.574,91.948 h1
  text "-" at 75.176,91.821 h1
  text "47U" at 86.098,90.932 h1
  text "47U" at 66.794,90.805 h1
  text "47U" at 76.7,90.805 h1
  text "39K" at 83.304,90.805 h1 r90
  text "39K" at 73.652,90.678 h1 r90
  text "3V" at 64.508,89.916 h2 r270
  text "1K" at 11.303,89.281 h1 r270
  text "9V" at 5.334,89.154 h2 r270
  text "+" at 61.714,88.773 h2
  text "-" at 0.762,88.011 h1.52
  text "100" at 54.61,87.63 h1 r90
  text "CD4017" at 20.574,86.995 h2.5
  text "MULTI" at 42.545,86.36 h1 r90
  text "+" at 0.762,85.471 h1.52
  text "-" at 62.476,85.217 h2
  text "COLOR LED" at 44.069,84.709 h1 r90
  text "C828" at 82.55,83.82 h0.8
  text "C828" at 72.644,83.693 h0.8
  text "C828" at 66.929,83.566 h0.8
  text "A.I. PCB" at 4.191,82.677 h2
  text "RGB LED CHASER" at 37.338,82.423 h1.6
  text "-" at 1.524,78.232 h1.52
  text "-" at 7.366,78.232 h1.52
  text "-" at 13.208,78.105 h1.52
  text "-" at 19.05,78.105 h1.52
  text "-" at 24.892,78.105 h1.52
  text "-" at 30.734,78.105 h1.52
  text "-" at 36.576,78.105 h1.52
  text "-" at 42.418,78.105 h1.52
  text "-" at 48.26,78.105 h1.52
  text "-" at 54.102,78.105 h1.52
  text "A.I. PCB" at 70.739,77.216 h0.7
  text "+" at 87.376,76.835 h1
  text "+" at 68.072,76.708 h1
  text "+" at 77.343,76.708 h1
  text "+" at 7.239,76.2 h1.52
  text "+" at 1.524,76.073 h1.52
  text "+" at 13.208,76.073 h1.52
  text "+" at 24.765,76.073 h1.52
  text "+" at 30.734,76.073 h1.52
  text "+" at 36.576,76.073 h1.52
  text "+" at 42.418,76.073 h1.52
  text "+" at 19.05,75.946 h1.52
  text "+" at 48.26,75.946 h1.52
  text "+" at 54.102,75.946 h1.52
  text "-" at 87.376,74.168 h1
  text "-" at 68.072,74.041 h1
  text "-" at 77.47,74.041 h1
  text "LED" at 76.708,73.787 h1 r90
  text "LED" at 67.437,73.66 h1 r90
  text "LED" at 86.741,73.66 h1 r90
  text "39K" at 64.389,70.612 h1 r90
  text "+" at 70.485,69.977 h1
  text "+" at 89.789,69.977 h1
  text "+" at 80.391,69.85 h1
  text "-" at 65.405,69.723 h1
  text "-" at 84.709,69.723 h1
  text "-" at 75.311,69.596 h1
  text "1K" at 11.43,69.215 h1 r270
  text "9V" at 5.461,69.088 h2 r270
  text "47U" at 86.233,68.707 h1
  text "47U" at 66.929,68.58 h1
  text "47U" at 76.835,68.58 h1
  text "39K" at 83.439,68.58 h1 r90
  text "39K" at 73.787,68.453 h1 r90
  text "-" at 0.889,67.945 h1.52
  text "3V" at 64.643,67.691 h2 r270
  text "100" at 54.737,67.564 h1 r90
  text "CD4017" at 20.701,66.929 h2.5
  text "+" at 61.849,66.548 h2
  text "MULTI" at 42.672,66.294 h1 r90
  text "+" at 0.889,65.405 h1.52
  text "COLOR LED" at 44.196,64.643 h1 r90
  text "-" at 62.611,62.992 h2
  text "A.I. PCB" at 4.318,62.611 h2
  text "RGB LED CHASER" at 37.465,62.357 h1.6
  text "C828" at 82.685,61.595 h0.8
  text "C828" at 72.779,61.468 h0.8
  text "C828" at 67.064,61.341 h0.8
  text "-" at 1.524,58.166 h1.52
  text "-" at 7.366,58.166 h1.52
  text "-" at 13.208,58.039 h1.52
  text "-" at 19.05,58.039 h1.52
  text "-" at 24.892,58.039 h1.52
  text "-" at 30.734,58.039 h1.52
  text "-" at 36.576,58.039 h1.52
  text "-" at 42.418,58.039 h1.52
  text "-" at 48.26,58.039 h1.52
  text "-" at 54.102,58.039 h1.52
  text "+" at 7.239,56.134 h1.52
  text "+" at 1.524,56.007 h1.52
  text "+" at 13.208,56.007 h1.52
  text "+" at 24.765,56.007 h1.52
  text "+" at 30.734,56.007 h1.52
  text "+" at 36.576,56.007 h1.52
  text "+" at 42.418,56.007 h1.52
  text "+" at 19.05,55.88 h1.52
  text "+" at 48.26,55.88 h1.52
  text "+" at 54.102,55.88 h1.52
  text "100" at 74.549,54.737 h1 r180
  text "100" at 95.504,54.737 h1 r180
  text "-" at 64.008,54.102 h1.52 r90
  text "+" at 66.167,54.102 h1.52 r90
  text "-" at 84.963,54.102 h1.52 r90
  text "+" at 87.122,54.102 h1.52 r90
  text "1K" at 11.43,49.149 h1 r270
  text "9V" at 5.461,49.022 h2 r270
  text "-" at 64.008,48.26 h1.52 r90
  text "+" at 66.167,48.26 h1.52 r90
  text "-" at 84.963,48.26 h1.52 r90
  text "+" at 87.122,48.26 h1.52 r90
  text "-" at 0.889,47.879 h1.52
  text "100" at 54.737,47.498 h1 r90
  text "CD4017" at 20.701,46.863 h2.5
  text "MULTI" at 42.672,46.228 h1 r90
  text "+" at 0.889,45.339 h1.52
  text "COLOR LED" at 44.196,44.577 h1 r90
  text "COLOR LED" at 77.47,44.196 h1 r180
  text "COLOR LED" at 98.425,44.196 h1 r180
  text "MULTI" at 75.819,42.672 h1 r180
  text "MULTI" at 96.774,42.672 h1 r180
  text "A.I. PCB" at 4.318,42.545 h2
  text "-" at 64.008,42.418 h1.52 r90
  text "+" at 66.04,42.418 h1.52 r90
  text "-" at 84.963,42.418 h1.52 r90
  text "+" at 86.995,42.418 h1.52 r90
  text "RGB LED CHASER" at 37.465,42.291 h1.6
  text "-" at 1.651,37.465 h1.52
  text "-" at 7.493,37.465 h1.52
  text "RGB LED CHASER" at 79.756,37.465 h1.6 r90
  text "RGB LED CHASER" at 100.711,37.465 h1.6 r90
  text "-" at 13.335,37.338 h1.52
  text "-" at 19.177,37.338 h1.52
  text "-" at 25.019,37.338 h1.52
  text "-" at 30.861,37.338 h1.52
  text "-" at 36.703,37.338 h1.52
  text "-" at 42.545,37.338 h1.52
  text "-" at 48.387,37.338 h1.52
  text "-" at 54.229,37.338 h1.52
  text "-" at 64.008,36.576 h1.52 r90
  text "+" at 66.04,36.576 h1.52 r90
  text "-" at 84.963,36.576 h1.52 r90
  text "+" at 86.995,36.576 h1.52 r90
  text "+" at 7.366,35.433 h1.52
  text "+" at 1.651,35.306 h1.52
  text "+" at 13.335,35.306 h1.52
  text "+" at 24.892,35.306 h1.52
  text "+" at 30.861,35.306 h1.52
  text "+" at 36.703,35.306 h1.52
  text "+" at 42.545,35.306 h1.52
  text "+" at 19.177,35.179 h1.52
  text "+" at 48.387,35.179 h1.52
  text "+" at 54.229,35.179 h1.52
  text "-" at 64.008,30.734 h1.52 r90
  text "+" at 66.04,30.734 h1.52 r90
  text "-" at 84.963,30.734 h1.52 r90
  text "+" at 86.995,30.734 h1.52 r90
  text "1K" at 11.557,28.448 h1 r270
  text "9V" at 5.588,28.321 h2 r270
  text "-" at 1.016,27.178 h1.52
  text "100" at 54.864,26.797 h1 r90
  text "CD4017" at 20.828,26.162 h2.5
  text "MULTI" at 42.799,25.527 h1 r90
  text "-" at 64.008,24.892 h1.52 r90
  text "-" at 84.963,24.892 h1.52 r90
  text "+" at 66.04,24.765 h1.52 r90
  text "+" at 86.995,24.765 h1.52 r90
  text "+" at 1.016,24.638 h1.52
  text "COLOR LED" at 44.323,23.876 h1 r90
  text "A.I. PCB" at 4.445,21.844 h2
  text "RGB LED CHASER" at 37.592,21.59 h1.6
  text "CD4017" at 75.184,20.701 h2.5 r90
  text "CD4017" at 96.139,20.701 h2.5 r90
  text "-" at 64.008,19.05 h1.52 r90
  text "+" at 66.167,19.05 h1.52 r90
  text "-" at 84.963,19.05 h1.52 r90
  text "+" at 87.122,19.05 h1.52 r90
  text "-" at 1.651,16.941 h1.52
  text "-" at 7.493,16.941 h1.52
  text "-" at 13.335,16.814 h1.52
  text "-" at 19.177,16.814 h1.52
  text "-" at 25.019,16.814 h1.52
  text "-" at 30.861,16.814 h1.52
  text "-" at 36.703,16.814 h1.52
  text "-" at 42.545,16.814 h1.52
  text "-" at 48.387,16.814 h1.52
  text "-" at 54.229,16.814 h1.52
  text "+" at 7.366,14.909 h1.52
  text "+" at 1.651,14.782 h1.52
  text "+" at 13.335,14.782 h1.52
  text "+" at 24.892,14.782 h1.52
  text "+" at 30.861,14.782 h1.52
  text "+" at 36.703,14.782 h1.52
  text "+" at 42.545,14.782 h1.52
  text "+" at 19.177,14.655 h1.52
  text "+" at 48.387,14.655 h1.52
  text "+" at 54.229,14.655 h1.52
  text "-" at 64.008,13.208 h1.52 r90
  text "+" at 66.04,13.208 h1.52 r90
  text "-" at 84.963,13.208 h1.52 r90
  text "+" at 86.995,13.208 h1.52 r90
  text "1K" at 72.898,11.43 h1
  text "1K" at 93.853,11.43 h1
  text "1K" at 11.557,7.924 h1 r270
  text "9V" at 5.588,7.797 h2 r270
  text "-" at 63.881,7.366 h1.52 r90
  text "-" at 84.836,7.366 h1.52 r90
  text "+" at 65.913,7.239 h1.52 r90
  text "+" at 86.868,7.239 h1.52 r90
  text "-" at 1.016,6.654 h1.52
  text "100" at 54.864,6.273 h1 r90
  text "CD4017" at 20.828,5.638 h2.5
  text "9V" at 73.025,5.461 h2
  text "9V" at 93.98,5.461 h2
  text "MULTI" at 42.799,5.003 h1 r90
  text "A.I. PCB" at 79.502,4.318 h2 r90
  text "A.I. PCB" at 100.457,4.318 h2 r90
  text "+" at 1.016,4.114 h1.52
  text "COLOR LED" at 44.323,3.352 h1 r90
  text "-" at 63.881,1.524 h1.52 r90
  text "+" at 66.04,1.524 h1.52 r90
  text "-" at 84.836,1.524 h1.52 r90
  text "+" at 86.995,1.524 h1.52 r90
  text "A.I. PCB" at 4.445,1.32 h2
  text "RGB LED CHASER" at 37.592,1.066 h1.6
  text "-" at 74.168,0.889 h1.52 r90
  text "+" at 76.708,0.889 h1.52 r90
  text "-" at 95.123,0.889 h1.52 r90
  text "+" at 97.663,0.889 h1.52 r90
Bottom Overlay:
  text "A.I. PCB" at 84.447,98.171 h2
  text "A.I. PCB" at 18.923,82.55 h2.4
  text "RGB MULTI COLOR LED CHASER" at 59.055,82.423 h1.5
  text "A.I. PCB" at 84.582,75.946 h2
  text "A.I. PCB" at 19.05,62.484 h2.4
  text "RGB MULTI COLOR LED CHASER" at 59.182,62.357 h1.5
  text "RGB MULTI COLOR LED CHASER" at 79.756,59.182 h1.5 r90
  text "RGB MULTI COLOR LED CHASER" at 100.711,59.182 h1.5 r90
  text "A.I. PCB" at 19.05,42.418 h2.4
  text "RGB MULTI COLOR LED CHASER" at 59.182,42.291 h1.5
  text "A.I. PCB" at 19.177,21.717 h2.4
  text "RGB MULTI COLOR LED CHASER" at 59.309,21.59 h1.5
  text "A.I. PCB" at 79.629,19.05 h2.4 r90
  text "A.I. PCB" at 100.584,19.05 h2.4 r90
  text "A.I. PCB" at 19.177,1.193 h2.4
  text "RGB MULTI COLOR LED CHASER" at 59.309,1.066 h1.5